# EAGLE board Slave (EAGLE 9.6.2)
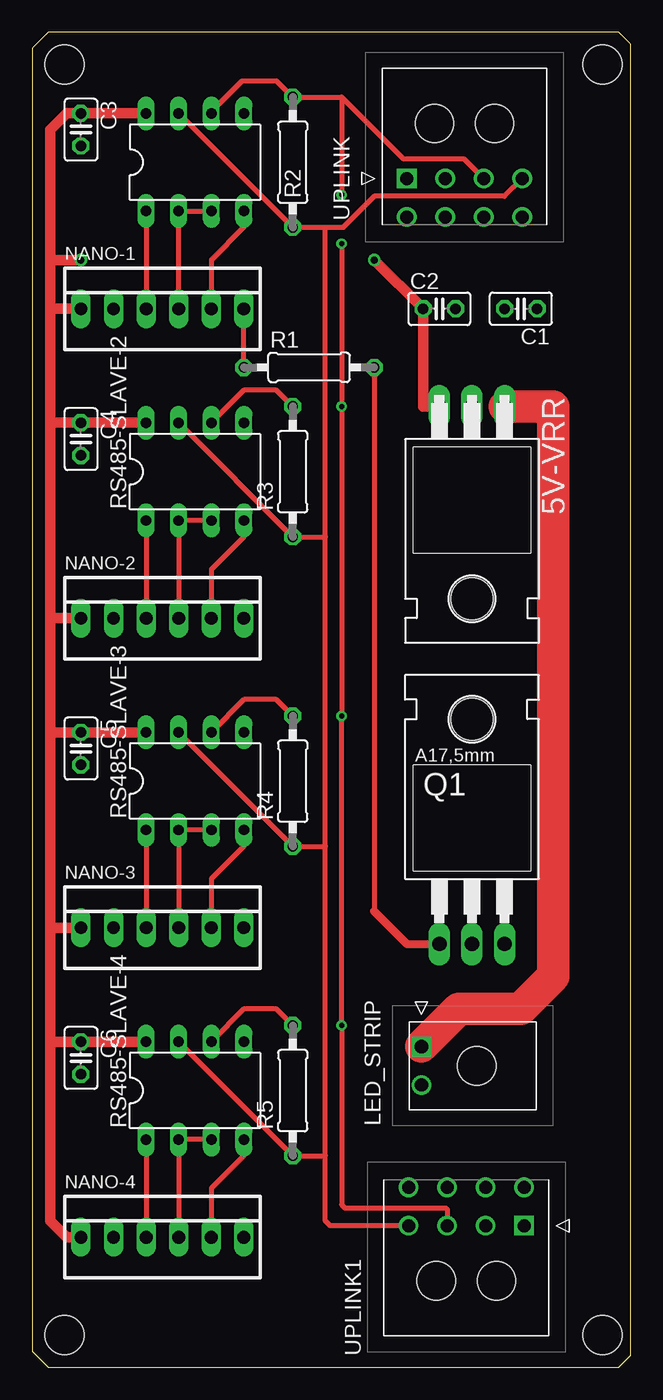
[diagram p0: board, top side]
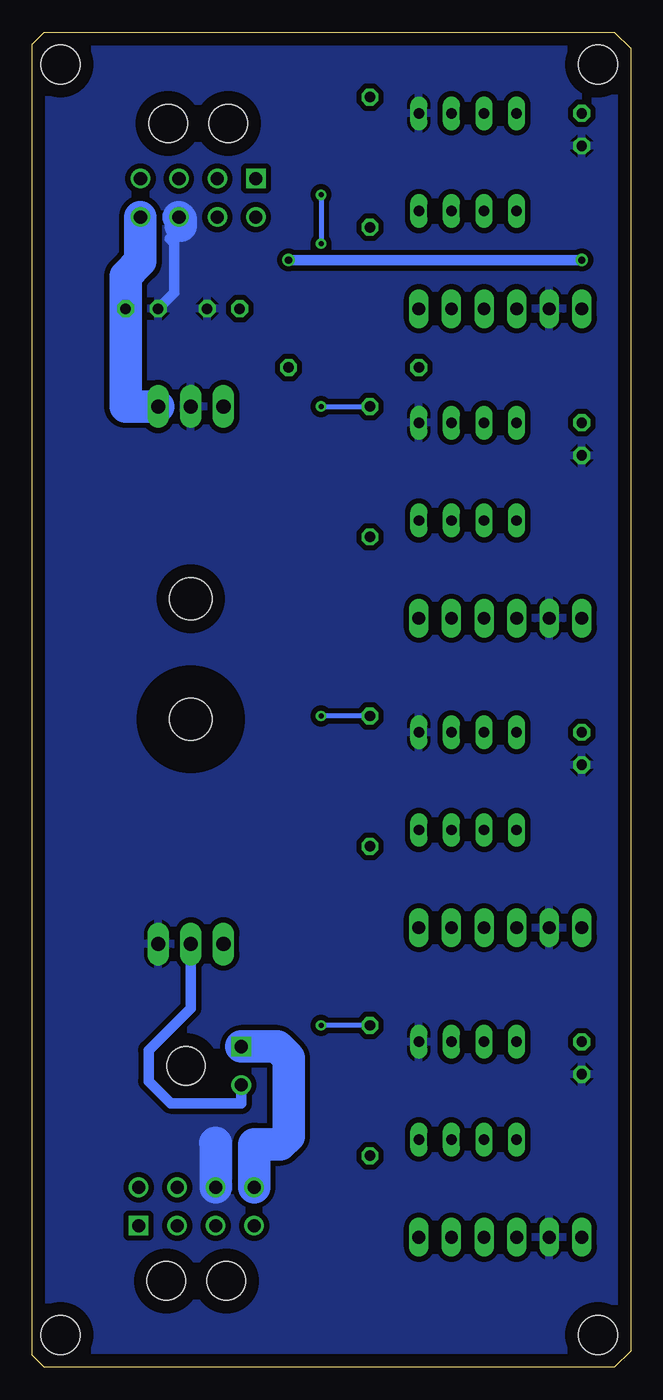
[diagram p1: board, bottom side, seen from below]

Size 46.66 x 104.13 mm. Coordinates in mm from the lower left corner, seen from the top.
Outline: 0,102.87 0,1.27 1.27,0 45.72,0 46.66,0.94 46.66,103.19 45.72,104.13 1.26,104.13 0,102.87
Copper layers (1*16): Top 0.035mm / dielectric 1.5mm / Bottom 0.035mm
Design rules "default": minimum track width 6mil, minimum drill 0.35mm, track to track 6mil, track to pad 6mil, pad to pad 6mil, via to via 6mil, smd to smd 6mil, copper to edge 40mil, drill to drill 6mil, minimum pad ring 10mil, minimum via ring 8mil, stop-mask expansion 4mil, vias tented up to drill 0mil, thermal gap 10mil
Net classes: 0 default: width 0.406 mm, drill 0.254 mm, clearance 0.406 mm
Holes 3.05 mm at 2.54,101.6 44.45,101.6 2.54,2.54 44.45,2.54

## Footprints (pad centres in the part's own frame; a part is rotated, then mirrored left to right if it is on the bottom)
TO220H = drill 1.118 long: 1 -2.54,-10.16; 2 0,-10.16; 3 2.54,-10.16 | hole 3.302: 0,4.826
C025-025X050 = drill 0.813 octagon: 1 -1.27,0; 2 1.27,0
215760-YY02 = drill 1.02 pad 1.52 square: 1 0,0 | drill 1.02 pad 1.52: 2 -3,0 | hole 3: -1.5,-4.3
22-23-2061 = drill 1 long: 1 -6.35,0; 2 -3.81,0; 3 -1.27,0; 4 1.27,0; 5 3.81,0; 6 6.35,0
TO220AH = drill 1.118 long: B -2.54,-6.35; C 0,-6.35; E 2.54,-6.35 | hole 3.302: 0,11.176
0207/10 = drill 0.813 octagon: 1 -5.08,0; 2 5.08,0
DIL08 = drill 0.813 long: 1 -3.81,-3.81; 2 -1.27,-3.81; 3 1.27,-3.81; 4 3.81,-3.81; 5 3.81,3.81; 6 1.27,3.81; 7 -1.27,3.81; 8 -3.81,3.81
212528-08YY = drill 1.02 pad 1.52 square: 1 0,0 | drill 1.02 pad 1.52: 2 -3,0; 3 -6,0; 4 -9,0; 5 0,3; 6 -3,3; 7 -6,3; 8 -9,3 | hole 3: -2.16,-4.3; -6.84,-4.3

## Placement (x,y rotation side)
5V-VRR  L7805CV  [TO220H]  34.29,64.77 180 top
C1  0.33uF  [C025-025X050]  38.1,82.55 180 top
C2  0.1uF  [C025-025X050]  31.75,82.55 0 top
C3  0.1uF  [C025-025X050]  3.81,96.52 270 top
C4  0.1uF  [C025-025X050]  3.81,72.39 270 top
C5  0.1uF  [C025-025X050]  3.81,48.26 270 top
C6  0.1uF  [C025-025X050]  3.81,24.13 270 top
LED_STRIP  215760-3002  [215760-YY02]  30.35,25.02 90 top
NANO-1  6P  [22-23-2061]  10.16,82.55 0 top
NANO-2  6P  [22-23-2061]  10.16,58.42 0 top
NANO-3  6P  [22-23-2061]  10.16,34.29 0 top
NANO-4  6P  [22-23-2061]  10.16,10.16 0 top
Q1  TIP120  [TO220AH]  34.29,39.37 0 top
R1  1K  [0207/10]  21.59,77.98 0 top
R2  120Ω OPT  [0207/10]  20.32,93.98 90 top
R3  120Ω OPT  [0207/10]  20.32,69.85 90 top
R4  120Ω OPT  [0207/10]  20.32,45.72 90 top
R5  120Ω OPT  [0207/10]  20.32,21.59 90 top
RS485-SLAVE-1  MAX487CPA  [DIL08]  12.7,93.98 0 top
RS485-SLAVE-2  MAX487CPA  [DIL08]  12.7,69.85 0 top
RS485-SLAVE-3  MAX487CPA  [DIL08]  12.7,45.72 0 top
RS485-SLAVE-4  MAX487CPA  [DIL08]  12.7,21.59 0 top
UPLINK  212528-0801  [212528-08YY]  29.21,92.71 180 top
UPLINK1  212528-0801  [212528-08YY]  38.35,11.05 0 top

## Library data of the parts
5V-VRR = linear
C1-C6 = rcl; SPICEPREFIX: C
LED_STRIP = SamacSys_Parts; DESCRIPTION: Micro-Fit+ Right-Angle Header, 3.00mm Pitch, Single Row, 2 Circuits, UL 94V-0, Glow-Wire Capable, Black; HEIGHT: 5.87mm; MANUFACTURER_NAME: Molex; MANUFACTURER_PART_NUMBER: 215760-3002; MOUSER_PART_NUMBER: 538-215760-3002; MOUSER_PRICE-STOCK: https://www.mouser.co.uk/ProductDetail/Molex/215760-3002?qs=pBJMDPsKWf2Kd79WPESr9w%3D%3D
NANO-1-NANO-4 = con-molex; MF: MOLEX; MPN: 22-23-2061; OC_FARNELL: 1462922; OC_NEWARK: 27C1933
Q1 = transistor-power
R1-R5 = rcl; SPICEPREFIX: R
RS485-SLAVE-1-RS485-SLAVE-4 = A10 Library; MPN: MAX487CPA; OC_FARNELL: unknown; OC_NEWARK: unknown
UPLINK UPLINK1 = SamacSys_Parts; DESCRIPTION: Micro-Fit+ Right-Angle Header, 3.00mm Pitch, Dual Row, 8 Circuits, UL 94V-0, Glow-Wire Capable, Black; HEIGHT: 14mm; MANUFACTURER_NAME: Molex; MANUFACTURER_PART_NUMBER: 212528-0801; MOUSER_PART_NUMBER: 538-212528-0801; MOUSER_PRICE-STOCK: https://www.mouser.co.uk/ProductDetail/Molex/212528-0801?qs=W%2FMpXkg%252BdQ6GImXrcV4pVA%3D%3D

## Nets
GND: 5V-VRR.2 C1.2 C2.2 C3.2 C4.2 C5.2 C6.2 NANO-1.2 NANO-2.2 NANO-3.2 NANO-4.2 Q1.E RS485-SLAVE-1.5 RS485-SLAVE-2.5 RS485-SLAVE-3.5 RS485-SLAVE-4.5 UPLINK1.7 UPLINK.7
LED_GND: LED_STRIP.2 Q1.C
N$1: Q1.B R1.2
NANO_1_DIM: NANO-1.6 R1.1
NANO_1_P2: NANO-1.4 RS485-SLAVE-1.2 RS485-SLAVE-1.3
NANO_1_RX: NANO-1.3 RS485-SLAVE-1.1
NANO_1_TX: NANO-1.5 RS485-SLAVE-1.4
NANO_2_P2: NANO-2.4 RS485-SLAVE-2.2 RS485-SLAVE-2.3
NANO_2_RX: NANO-2.3 RS485-SLAVE-2.1
NANO_2_TX: NANO-2.5 RS485-SLAVE-2.4
NANO_3_P2: NANO-3.4 RS485-SLAVE-3.2 RS485-SLAVE-3.3
NANO_3_RX: NANO-3.3 RS485-SLAVE-3.1
NANO_3_TX: NANO-3.5 RS485-SLAVE-3.4
NANO_4_P2: NANO-4.4 RS485-SLAVE-4.2 RS485-SLAVE-4.3
NANO_4_RX: NANO-4.3 RS485-SLAVE-4.1
NANO_4_TX: NANO-4.5 RS485-SLAVE-4.4
RS485_A: R2.2 R3.2 R4.2 R5.2 RS485-SLAVE-1.6 RS485-SLAVE-2.6 RS485-SLAVE-3.6 RS485-SLAVE-4.6 UPLINK1.3 UPLINK.3
RS485_B: R2.1 R3.1 R4.1 R5.1 RS485-SLAVE-1.7 RS485-SLAVE-2.7 RS485-SLAVE-3.7 RS485-SLAVE-4.7 UPLINK1.4 UPLINK.4
VCC: 5V-VRR.3 C2.1 C3.1 C4.1 C5.1 C6.1 NANO-1.1 NANO-2.1 NANO-3.1 NANO-4.1 RS485-SLAVE-1.8 RS485-SLAVE-2.8 RS485-SLAVE-3.8 RS485-SLAVE-4.8
VCC12: 5V-VRR.1 C1.1 LED_STRIP.1 UPLINK1.8 UPLINK.8

## Tracks (layer width: path | path; a pad name or v marks a point on that pad's centre or on a via)
GND
  Bottom 0.813: 35.94,88.01 35.56,87.63 35.56,83.82 C1.2
  Bottom 2.54: UPLINK1.7 32.35,17.5 32.38,17.53 | UPLINK.7 35.05,89.55 35.05,89.03
  pour Bottom: -3.81,107.95 52.07,107.95 52.07,-3.81 -3.81,-3.81
LED_GND
  Bottom 0.813: Q1.C 34.29,28.02 37.58,24.73 37.58,22.31 35.86,20.6 30.38,20.6 30.35,20.57 LED_STRIP.2
N$1
  Top 0.406: R1.2 26.67,35.56
  Top 0.61: 26.67,35.56 29.21,33.02 Q1.B
NANO_1_DIM
  Top 0.406: R1.1 NANO-1.6
NANO_1_P2
  Top 0.406: NANO-1.4 RS485-SLAVE-1.2 RS485-SLAVE-1.3
NANO_1_RX
  Top 0.406: RS485-SLAVE-1.1 NANO-1.3
NANO_1_TX
  Top 0.406: RS485-SLAVE-1.4 16.51,88.9 13.97,86.36 NANO-1.5
NANO_2_P2
  Top 0.406: RS485-SLAVE-2.3 RS485-SLAVE-2.2 NANO-2.4
NANO_2_RX
  Top 0.406: RS485-SLAVE-2.1 NANO-2.3
NANO_2_TX
  Top 0.406: RS485-SLAVE-2.4 16.51,64.77 13.97,62.23 NANO-2.5
NANO_3_P2
  Top 0.406: RS485-SLAVE-3.3 RS485-SLAVE-3.2 NANO-3.4
NANO_3_RX
  Top 0.406: RS485-SLAVE-3.1 NANO-3.3
NANO_3_TX
  Top 0.406: RS485-SLAVE-3.4 16.51,40.64 13.97,38.1 NANO-3.5
NANO_4_P2
  Top 0.406: RS485-SLAVE-4.3 RS485-SLAVE-4.2 NANO-4.4
NANO_4_RX
  Top 0.406: RS485-SLAVE-4.1 NANO-4.3
NANO_4_TX
  Top 0.406: RS485-SLAVE-4.4 16.51,16.51 13.97,13.97 NANO-4.5
RS485_A  (via drill 0.4)
  Top 0.406: UPLINK.3 33.69,94.23 28.96,94.23 24.13,99.06 | 24.13,99.06 R2.2 19.05,100.33 16.38,100.33 13.97,97.92 RS485-SLAVE-1.6 | 24.13,99.06 v24.13,91.44 | v24.13,87.63 v24.13,74.93 v24.13,50.8 v24.13,26.67 24.13,12.7 24.38,12.45 32.26,12.45 32.35,12.35 UPLINK1.3 | R3.2 19.05,76.2 16.51,76.2 RS485-SLAVE-2.6 | R4.2 19.05,52.07 16.51,52.07 RS485-SLAVE-3.6 | R5.2 19.05,27.94 16.51,27.94 RS485-SLAVE-4.6
  Bottom 0.406: v24.13,91.44 v24.13,87.63 | v24.13,74.93 R3.2 | R4.2 v24.13,50.8 | R5.2 v24.13,26.67
RS485_B
  Top 0.406: UPLINK.4 36.81,91.31 26.67,91.31 24.26,88.9 22.86,88.9 | RS485-SLAVE-1.7 R2.1 22.86,88.9 | 22.86,16.51 22.86,11.43 23.24,11.05 UPLINK1.4 | 22.86,16.51 22.86,40.64 | 22.86,40.64 22.86,64.77 | 22.86,64.77 22.86,88.9 | 22.86,64.77 R3.1 RS485-SLAVE-2.7 | 22.86,40.64 R4.1 RS485-SLAVE-3.7 | 22.86,16.51 R5.1 RS485-SLAVE-4.7
VCC  (via drill 0.55)
  Top 0.813: 5V-VRR.3 30.48,74.93 C2.1 v26.67,86.36 | v3.81,86.36 1.42,86.36 | 1.42,86.36 1.42,96.52 2.69,97.79 C3.1 RS485-SLAVE-1.8 | 1.42,86.36 1.42,82.55 | NANO-1.1 1.42,82.55 | 1.42,82.55 1.42,73.66 | 1.42,73.66 C4.1 RS485-SLAVE-2.8 | 1.42,73.66 1.42,58.42 | NANO-2.1 1.42,58.42 | 1.42,58.42 1.42,49.53 | 1.42,49.53 C5.1 RS485-SLAVE-3.8 | 1.42,49.53 1.42,34.29 | NANO-3.1 1.42,34.29 | 1.42,34.29 1.42,25.4 | 1.42,25.4 C6.1 RS485-SLAVE-4.8 | 1.42,25.4 1.42,11.43 2.69,10.16 NANO-4.1
  Bottom 0.813: v26.67,86.36 v3.81,86.36
VCC12
  Top 2.54: LED_STRIP.1 33.27,27.94 38.1,27.94 40.64,30.48 40.64,74.93 5V-VRR.1
  Bottom 2.54: LED_STRIP.1 27.56,25.02 26.67,24.13 26.67,18.03 27.3,17.4 29.34,17.4 29.35,17.38 UPLINK1.8 | UPLINK.8 38.21,86.25 39.37,85.09 C1.1 39.37,74.93 5V-VRR.1